# EAGLE board lt1236LS8_reference_module (EAGLE 7.4.0)
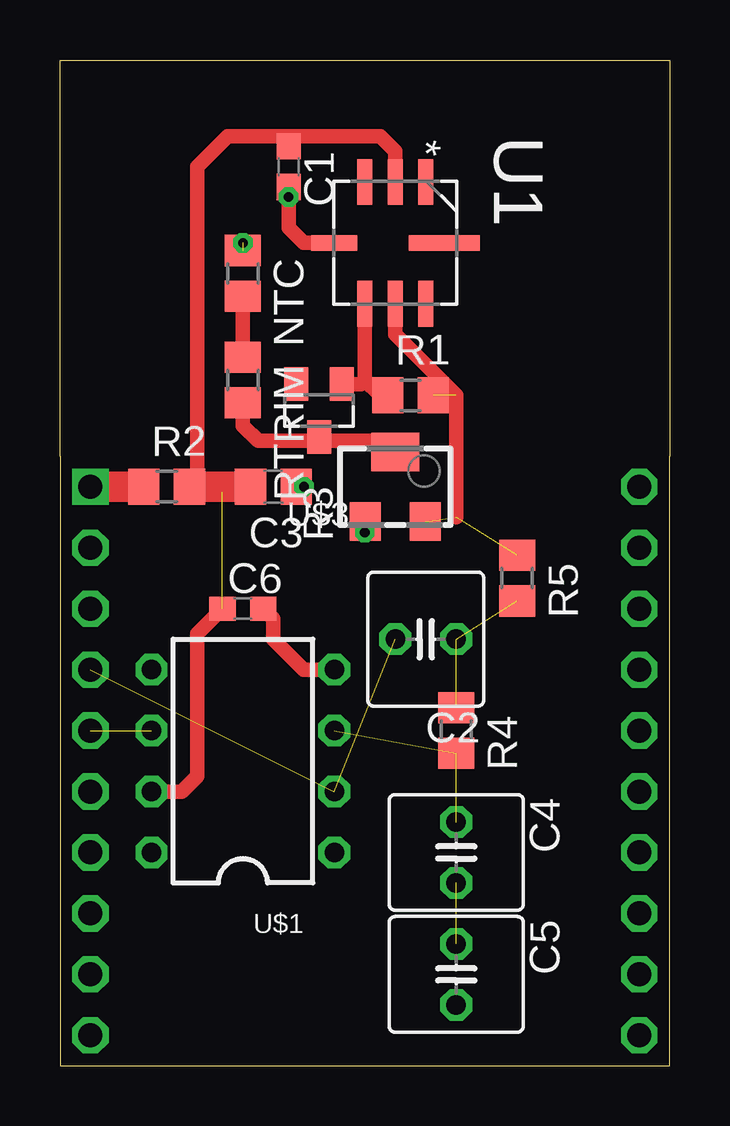
[diagram p0: board, top side]
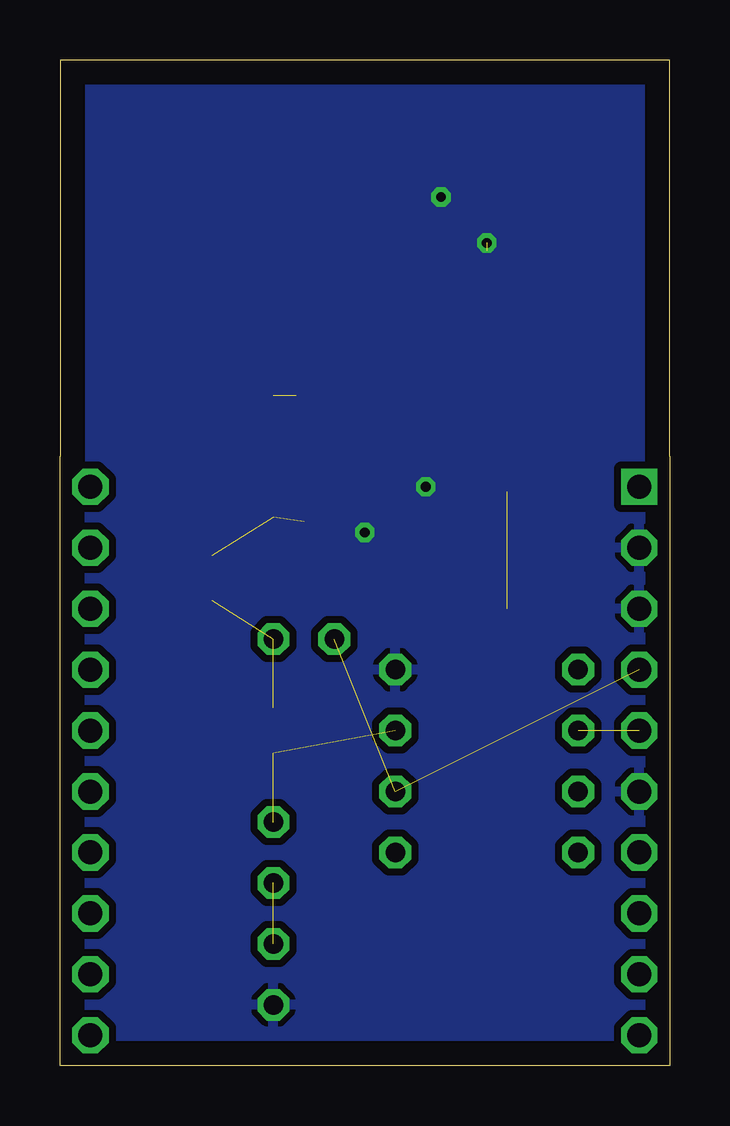
[diagram p1: board, bottom side, seen from below]

Size 25.4 x 41.91 mm. Coordinates in mm from the lower left corner, seen from the top.
Outline: 0,25.4 0,41.91 25.4,41.91 25.4,25.4
Copper layers (1*16): Top 0.035mm / dielectric 1.5mm / Bottom 0.035mm
Design rules "default": minimum track width 10mil, minimum drill 24mil, track to track 8mil, track to pad 8mil, pad to pad 8mil, via to via 8mil, smd to smd 8mil, copper to edge 40mil, drill to drill 8mil, minimum pad ring 10mil, minimum via ring 8mil, stop-mask expansion 4mil, vias tented up to drill 0mil, thermal gap 10mil

## Footprints (pad centres in the part's own frame; a part is rotated, then mirrored left to right if it is on the bottom)
C0603 = smd 1.1 x 1: 1 -0.85,0; 2 0.85,0
C025-060X050 = drill 0.813 octagon: 1 -1.27,0; 2 1.27,0
C0805 = smd 1.3 x 1.5: 1 -0.95,0; 2 0.95,0
R0805 = smd 1.3 x 1.5: 1 -0.95,0; 2 0.95,0
RTRIM3224W = smd 1.3 x 1.6: 1 -1.25,-1.45; 3 1.25,-1.45 | smd 2 x 1.6: 2 0,1.45
LS8_ELONG = smd 1.905 x 0.635: 1 -2.54,1.27; 2 -2.54,0; 3 -2.54,-1.27; 5 2.54,-1.27; 6 2.54,0; 7 2.54,1.27 | smd 0.635 x 1.905: 4 0,-2.54 | smd 0.635 x 2.97: 8 0,2.045
N8-PDIP8 = drill 0.813 octagon: 1 -3.81,-3.81; 2 -1.27,-3.81; 3 1.27,-3.81; 4 3.81,-3.81; 5 3.81,3.81; 6 1.27,3.81; 7 -1.27,3.81; 8 -3.81,3.81
METROLOGY_MODULE = drill 1 square: P$1 -11.43,11.43 | drill 1 octagon: P$2 -11.43,8.89; P$3 -11.43,6.35; P$4 -11.43,3.81; P$5 -11.43,1.27; P$6 -11.43,-1.27; P$7 -11.43,-3.81; P$8 -11.43,-6.35; P$9 -11.43,-8.89; P$10 -11.43,-11.43; P$11 11.43,-11.43; P$12 11.43,-8.89; P$13 11.43,-6.35; P$14 11.43,-3.81; P$15 11.43,-1.27; P$16 11.43,1.27; P$17 11.43,3.81; P$18 11.43,6.35; P$19 11.43,8.89; P$20 11.43,11.43
SOT23_HAND = smd 1 x 1.4: 1 -0.95,-1.1; 2 0.95,-1.1; 3 0,1.1

## Placement (x,y rotation side)
C1  100n  [C0603]  9.53,37.47 270 top
C2  1u  [C025-060X050]  15.24,17.78 180 top
C3  10u  [C0805]  8.89,24.13 180 top
C4  1u  [C025-060X050]  16.51,8.89 270 top
C5  1u  [C025-060X050]  16.51,3.81 270 top
C6  100n  [C0603]  7.62,19.05 0 top
NTC  [R0805]  7.62,33.02 270 top
R1  27k  [R0805]  14.61,27.94 0 top
R2  ferrite  [R0805]  4.45,24.13 0 top
R3  50k  [RTRIM3224W]  13.97,24.13 0 top
R4  36k  [R0805]  16.51,13.97 270 top
R5  36k  [R0805]  19.05,20.32 270 top
RTRIM  [R0805]  7.62,28.57 270 top
U1  LT1236BILS8-5PBFLS8_ELONG  [LS8_ELONG]  13.97,34.29 270 top
U$1  LT1001  [N8-PDIP8]  7.62,12.7 90 top
U$2  METROLOGY_MODULE  [METROLOGY_MODULE]  12.7,12.7 0 top
U$3  BAS17  [SOT23_HAND]  10.79,27.3 180 top

## Library data of the parts
C1-C6 NTC R1-R5 RTRIM = SquantorRCL
U1 U$1 = SquantorLinearTechnology
U$2 = SquantorPCBOutline
U$3 = SquantorNxp

## Nets
GND: C1.2 C3.1 C5.2 C6.2 NTC.1 R3.1 U1.4 U$1.4 U$2.P$2 U$2.P$3 U$2.P$6
N$1: R2.1 U$2.P$1
N$2: R3.2 RTRIM.2 U$3.3
N$3: NTC.2 RTRIM.1
N$5: C2.1 R4.1 R5.2
N$6: C4.1 R4.2 U$1.3
N$8: C4.2 C5.1
VCC_VREF: C1.1 C3.2 C6.1 R2.2 U1.2 U$1.7
VREF_IN: C2.2 U$1.2 U$2.P$4
VREF_OUT: U$1.6 U$2.P$5
VREF_OUT_UNFILT: R1.2 R3.3 R5.1 U1.6
VREF_TRIM: R1.1 U1.5 U$3.1

## Tracks (layer width: path | path; a pad name or v marks a point on that pad's centre or on a via)
GND  (via drill 0.4)  (1 unrouted)
  Top 0.61: U1.4 10.16,34.29 9.53,34.92 v9.53,36.2 C1.2 | U$1.4 10.16,16.51 8.89,17.78 8.89,18.63 C6.2 | R3.1 12.7,22.66 v12.7,22.23 | C3.1 v10.16,24.13
  other vias: 7.62,34.29
  pour Bottom (isolate 0.305): 0,41.91 25.4,41.91 25.4,0 0,0
N$1
  Top 1.27: U$2.P$1 R2.1
N$2
  Top 0.61: RTRIM.2 7.62,26.67 8.26,26.04 10.79,26.04 | 10.79,26.04 13.52,26.04 R3.2 | U$3.3 10.79,26.04
N$3
  Top 0.61: NTC.2 RTRIM.1
N$5  (2 unrouted)
N$6  (2 unrouted)
N$8  (1 unrouted)
VCC_VREF  (1 unrouted)
  Top 0.61: U1.2 13.97,38.1 13.34,38.73 9.53,38.73 | C1.1 9.53,38.73 | U$1.7 5.08,11.43 5.71,12.06 5.71,18 C6.1 | 6.77,23.91 6.99,24.13 | 9.53,38.73 6.99,38.73 5.71,37.47 5.71,24.45 R2.2
  Top 1.27: R2.2 6.99,24.13 C3.2
VREF_IN  (2 unrouted)
VREF_OUT  (1 unrouted)
VREF_OUT_UNFILT  (3 unrouted)
  Top 0.61: U1.6 13.97,30.48 16.51,27.94 16.51,22.86
VREF_TRIM
  Top 0.61: U1.5 12.7,28.57 | 12.7,28.57 13.34,27.94 R1.1 | 12.7,28.57 12.53,28.41 U$3.1